# Altium PCB PCB.PcbDoc
Units mil, origin at the board's own origin, x right, y up, seen from the top; angles counter-clockwise.
Board outline 1968.5 x 2362.2 mil, 2 copper layers (Top Layer, Bottom Layer); 42 components, 31 nets, 112 pads, 35 vias.
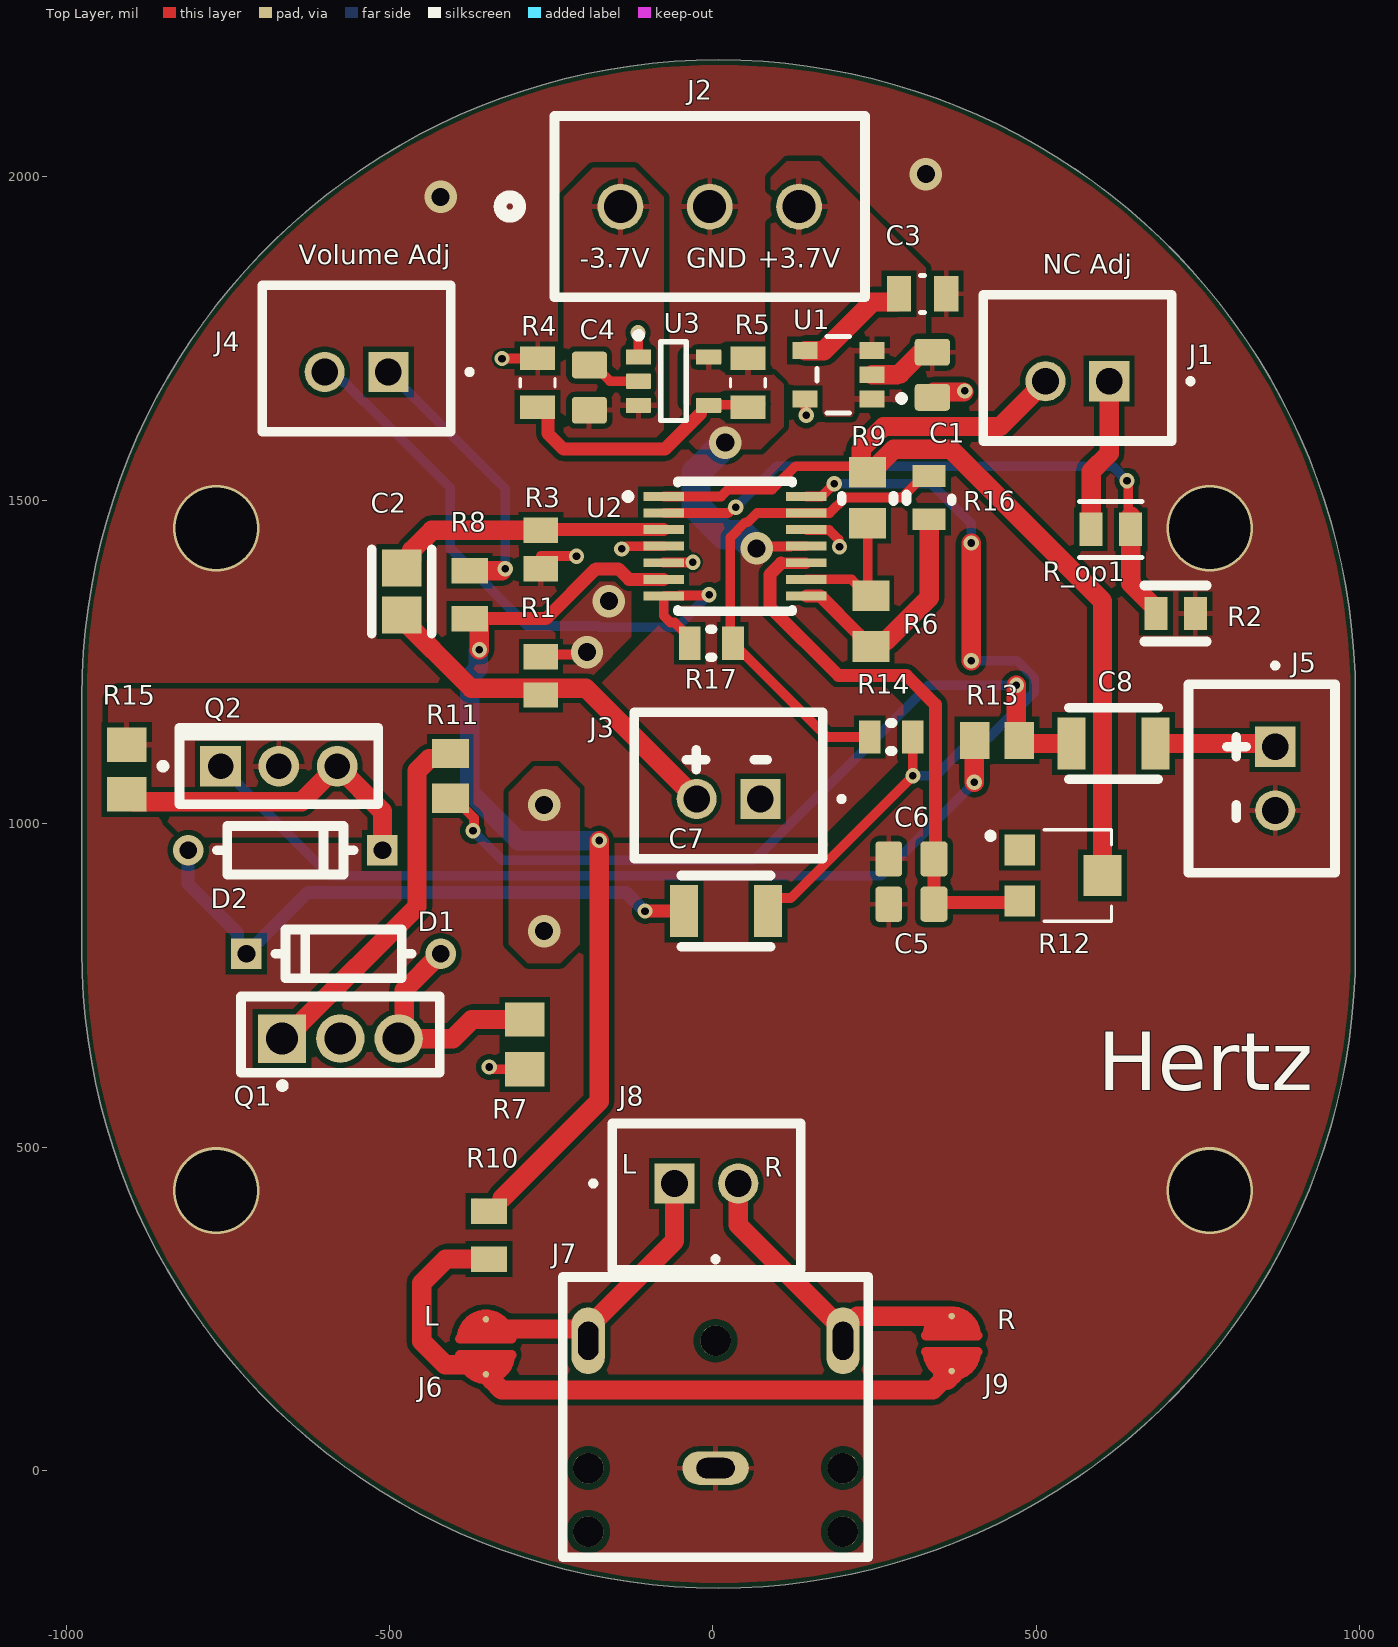
[diagram p0: Top Layer view]
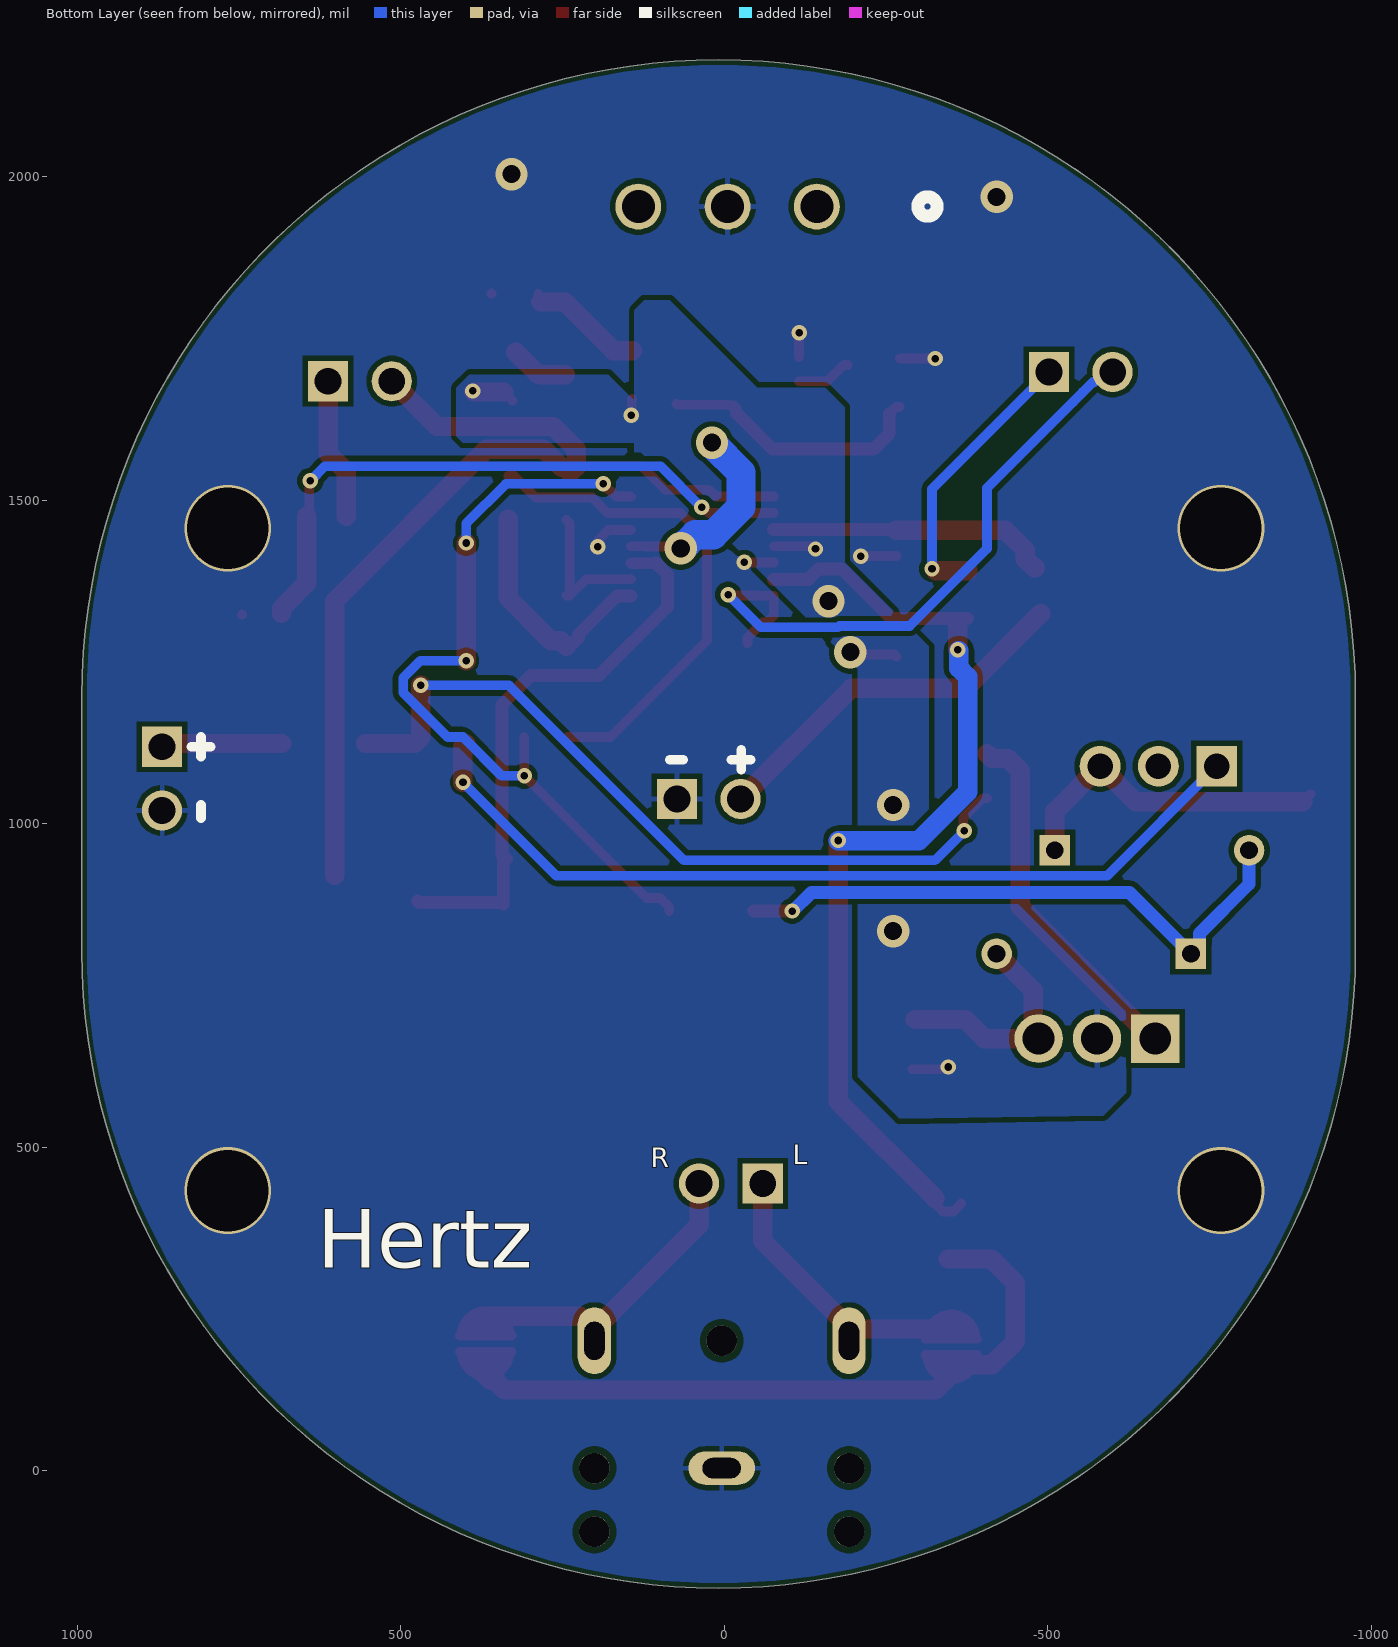
[diagram p1: Bottom Layer view, seen from below]

## Layer stack, top to bottom
Top Solder: solder mask 0.4, Solder Resist, Dk 3.5
Top Layer: signal copper 1.4
Dielectric 1: dielectric 12.6, FR-4, Dk 4.8
Bottom Layer: signal copper 1.4
Bottom Solder: solder mask 0.4, Solder Resist, Dk 3.5

## Board outline
-975.5,802.75 -975.5,1196.46 cw(c8.75,1196.46) 993,1196.46 993,802.75 cw(c8.75,802.75)

## Design rules (kind name [scope] priority, off if disabled: settings)
BoardOutlineClearance [All] p1: gap=7.87 ignorepadtopadclearanceinfootprint=FALSE
Clearance [All] p1: gap=8 ignorepadtopadclearanceinfootprint=FALSE except(9.84: Arc-Hole Track-Hole SMDPad-Hole THPad-Hole Via-Hole Fill-Hole Poly-Hole Region-Hole Text-Hole)
ComponentClearance [All] p1: gap=5 collisioncheckmode=3 verticalgap=5 showdistances=TRUE
DiffPairsRouting [All] p1: maxlimit=15 minlimit=8 mostfreqgap=8 toplayer_minwidth=8 toplayer_maxwidth=1000 toplayer_prefwidth=8 bottomlayer_minwidth=8 bottomlayer_maxwidth=1000 bottomlayer_prefwidth=8 maxuncoupledlength=500
Height [All] p1: minheight=0 maxheight=71497.94 prefheight=500
HoleSize [All] p1: absolutevalues=TRUE maxlimit=248.03 minlimit=11.81 maxpercent=80.000 minpercent=20.000
HoleToHoleClearance [All] p1: gap=9.84 allowstackedmicrovias=FALSE
MinimumAnnularRing [All] p1: minimumring=3
MinimumSolderMaskSliver [All] p1: minsoldermaskwidth=0
PlaneClearance [All] p1: clearance=8
PlaneConnect PlaneConnectPowerPads [InPadClass('PowerPads')] p1: planeconnectstyle=Direct reliefexpansion=20 reliefentries=4 reliefconductorwidth=10 reliefairgap=10
PlaneConnect [All] p2: pad.planeconnectstyle=Relief pad.reliefexpansion=11.81 pad.reliefentries=4 pad.reliefconductorwidth=8 pad.reliefairgap=8 via.planeconnectstyle=Direct via.reliefexpansion=11.81 via.reliefentries=4 via.reliefconductorwidth=5 via.reliefairgap=5
PolygonConnect PolygonConnectPowerPads [All vs (InPadClass('PowerPads'))] p1: connectstyle=Direct reliefconductorwidth=10 reliefentries=4 polygonreliefangle="90 Angle" airgapwidth=10
PolygonConnect [All] p2: thpad.connectstyle=Relief thpad.reliefconductorwidth=8 thpad.reliefentries=4 thpad.polygonreliefangle="90 Angle" thpad.airgapwidth=8 smdpad.connectstyle=Relief smdpad.reliefconductorwidth=8 smdpad.reliefentries=4 smdpad.polygonreliefangle="90 Angle" smdpad.airgapwidth=8 via.connectstyle=Direct via.reliefconductorwidth=5 via.reliefentries=4 via.polygonreliefangle="90 Angle" via.airgapwidth=5
RoutingVias [All] p1: holewidth=11.81 width=23.62 viastyle="Through Hole" minholewidth=11.81 minwidth=23.62 maxholewidth=23.62 maxwidth=259.84
SilkToSilkClearance [All] p1: silktosilkclearance=0
SilkToSolderMaskClearance [IsPad] p1: minsilkscreentomaskgap=5 clearancetoexposedcopper=TRUE
SolderMaskExpansion [All] p1: expansion=2.95 istentingtop=FALSE
SupplyNets "Schematic Supply Nets" [InNet('GND')] p1: voltage=0.000
Width [All] p1: maxlimit=1000 minlimit=8 preferedwidth=20 minimp=50.000000 maximp=50.000000 favimp=50.000000
20 further rules are at their usual default settings.

## Components (designator, comment, footprint, x,y, rotation, side; value= is the part's Value field where it differs from the comment)
C1 "CL21B225KAFNNNE" CAPC2012X135N 339,1693.96 r270 top
C2 "CL21A106KAYNNNE" FP-CL21-IPC_A -481,1359 r90 top
C3 "CC0805KPX7R9BB471" FP-CC0805-0_85-MFG 324,1819 r0 top value="470 pF"
C4 "CL21B225KAFNNNE" CAPC2012X135N -191,1674.04 r270 top
C5 "CL21B225KAFNNNE" CAPC2012X135N 306.68,875.67 r0 top
C6 "CL21B225KAFNNNE" CAPC2012X135N 306.68,945.67 r0 top
C7 "GRM32ER60J227ME05L" FP-GRM32E-0_3-MFG 20,865 r180 top
C8 "GRM32ER60J227ME05L" FP-GRM32E-0_3-MFG 619,1124 r0 top
D1 "1N4148" FP-017AG-MFG -571,799 r0 top
D2 "1N4148" FP-017AG-MFG -661,959 r180 top
J1 "10K Pot" JST_B2B-XH-A 563.21,1704.67 r0 top
J2 "395011003" CONN_39501-1003_MOL -143,1954 r0 top
J3 "Mic" JST_B2B-XH-A 24,1059 r0 top
J4 "10K Pot" JST_B2B-XH-A -551,1719 r0 top
J5 "Mic" JST_B2B-XH-A 848.33,1069.79 r90 top
J6 "SolderBridge" PCBCOMPONENT_1#1 -351,189 r90 top
J7 "SJ1-3523N" CUI_SJ1-3523N 4,4 r0 top
J8 "Mic" JST_B2B-XH-A -10.21,423.33 r180 top
J9 "SolderBridge" PCBCOMPONENT_1#2 369,194 r90 top
Q1 "BD139G" FP-77-09-MFG -576,674 r90 top
Q2 "BD140G" ONSC-TO-225-3-77-09 -671,1089 r90 top
R1 "ERA-6AED5622V" RESC2013X60X40LL20T25 -266,1228.53 r90 top
R2 "CRGCQ0805F4K7" FP-CRGCQ0805-IPC_C 715,1325 r0 top value=4.7KΩ
R3 "ERA-6AED5622V" RESC2013X60X40LL20T25 -266,1424 r90 top
R4 "RC0805FR-0733KL" RESC2012X60N -271,1681.6 r270 top
R5 "RC0805JR-0768KL" RESC2012X60N 54,1681.6 r90 top
R6 "RC0805FR-1310KL" RESC2013X60X35ML10T20 244,1313.37 r270 top
R7 "ERJ-6ENF1001V" RESC2013X70X40ML20T20 -291,659 r270 top
R8 "CRG0805F3K9" RESC2012X65N -376,1354 r90 top
R9 "RC0805FR-1310KL" RESC2013X60X35ML10T20 239,1504 r270 top
R10 "CRG0805F3K9" RESC2012X65N -346,364 r90 top
R11 "ERJ-P06J100V" RESC2013X70X40NL20T20 -406,1074 r90 top
R12 "TC33X-2-203E" TRIM_TC33X-2-203E 545,920 r0 top
R13 "ERJ-P06J100V" RESC2013X70X40NL20T20 439,1129 r0 top
R14 "12K 1% 0805(2012)" RESC0805(2012)_L 275.53,1134 r0 top value="12000.00 Ohm"
R15 "ERJ-6ENF1001V" RESC2013X70X40ML20T20 -906,1084 r270 top
R16 "12K 1% 0805(2012)" RESC0805(2012)_L 334,1504 r90 top value="12000.00 Ohm"
R17 "12K 1% 0805(2012)" RESC0805(2012)_L -2.54,1279 r0 top value="12000.00 Ohm"
R_op1 "CRGCQ0805F4K7" FP-CRGCQ0805-IPC_C 615,1455 r180 top value=4.7KΩ
U1 "MIC5205-3.3YM5-TR" FP-M5-MFG 194,1694 r180 top
U2 "LM324BIPWR" FP-PW0014A-MFG 34,1429 r0 top
U3 "TPS72301QDBVRQ1" DBV0005A_N -61,1684 r0 top

## Footprints (in the part's own frame and the unit in brackets; to place one, negate y for a bottom-side part, rotate by r counter-clockwise, add the part's x,y. Pads: shape width x height; smd on the part's side, far side on the other; paste and mask are expansions set on the pad)
CAPC2012X135N [mm]
  rrect25% 1.05x1.38 smd paste+0 mask+0.102: 1(-0.888,0) 2(0.888,0)
  body extent -1,-0.63 1,0.63, height 1.35
CONN_39501-1003_MOL [mil]
  round 71 hole 51: 1(0,0) 2(138,0) 3(276,0)
  silkscreen extent -186,-140 378,140
CUI_SJ1-3523N [mm]
  oval 2.616x1.308 hole 0.8 slot 1.5 at 0 deg: 1(0,0)
  oval 1.308x2.616 hole 0.8 slot 1.5 at 90 deg: 2(5,5) 3(-5,5)
  round 1.2 hole 1.2 unplated: ""(-5,-2.5) ""(-5,0) ""(0,5) ""(5,-2.5) ""(5,0)
  silkscreen extent -6,-3.5 6,8.3, body extent -5.97,-6.77 6.03,7.53, height 5.55
DBV0005A_N [mm] "SOT23, 5-Leads, Body 3.05x1.75mm, Pitch 0.95mm, IPC Medium Density"
  rrect17% 1x0.6 smd: 1(-1.375,0.95) 2(-1.375,0) 3(-1.375,-0.95) 4(1.375,-0.95) 5(1.375,0.95)
  silkscreen extent -1.5,-1.55 0.5,1.92, body extent -1.42,-1.46 1.42,1.46, height 1.08
FP-017AG-MFG [mm]
  rect 1.2x1.2 hole 0.7 paste-2539.97 mask+0: 1(-3.813,0)
  round 1.2 hole 0.7 paste-2539.97 mask+0: 2(3.813,0)
  silkscreen extent -2.68,-0.95 2.68,0.95, body extent -4.51,-1.05 4.51,1.05, height 0.25
FP-77-09-MFG [mm]
  rect 1.9x1.9 hole 1.25 paste-2539.97 mask+0: 1(-0.155,2.29)
  round 1.9 hole 1.25 paste-2539.97 mask+0: 2(-0.155,0) 3(-0.155,-2.29)
  silkscreen extent -2.12,-3.9 1.5,3.9, body extent -1.6,-4 1.6,4, height 0.25
FP-CC0805-0_85-MFG [mm]
  rect 0.95x1.4 smd paste+0 mask+0: 1(-0.925,0) 2(0.925,0)
  silkscreen extent -0.08,-0.72 0.08,0.72, body extent -1.6,-1.05 1.6,1.05, height 0.25
FP-CL21-IPC_A [mil]
  rect 57.27x61.27 smd paste+0 mask+0: 1(-36.45,0) 2(36.45,0)
  silkscreen extent -65,-46 65,46, body extent -85,-50 85,50, height 10
FP-CRGCQ0805-IPC_C [mil]
  rect 35.67x51.57 smd paste+0 mask+0: 1(-30.55,0) 2(30.55,0)
  silkscreen extent -48,-43 48,43, body extent -52,-31 52,31, height 10
FP-GRM32E-0_3-MFG [mm]
  rect 1.1x2.05 smd paste+0 mask+0: 1(-1.65,0) 2(1.65,0)
  silkscreen extent -1.75,-1.4 1.75,1.4, body extent -2.3,-1.5 2.3,1.5, height 0.25
FP-M5-MFG [mm]
  rect 1x0.66 smd paste+0 mask+0: 1(-1.315,0.95) 2(-1.315,0) 3(-1.315,-0.95) 4(1.315,-0.95) 5(1.315,0.95)
  silkscreen extent -2.6,-1.5 0.85,1.5, body extent -1.91,-1.6 1.91,1.6, height 0.25
FP-PW0014A-MFG [mm]
  rect 1.6x0.35 smd paste-1000 mask+0: 1(-2.8,1.95) 2(-2.8,1.3) 3(-2.8,0.65) 4(-2.8,0) 5(-2.8,-0.65) 6(-2.8,-1.3) 7(-2.8,-1.95) 8(2.8,-1.95) 9(2.8,-1.3) 10(2.8,-0.65) 11(2.8,0) 12(2.8,0.65) 13(2.8,1.3) 14(2.8,1.95)
  silkscreen extent -4.32,-2.55 2.25,2.55, body extent -3.7,-2.8 3.7,2.8, height 0.25
JST_B2B-XH-A [mm]
  rect 1.575x1.575 / inner round 1.575 / far side rect 1.575x1.575 hole 1.05: 1(1.25,-0.525)
  round 1.575 hole 1.05: 2(-1.25,-0.525)
  silkscreen extent -3.7,-2.88 4.54,2.87
ONSC-TO-225-3-77-09 [mm] "FM, 3-Leads, Body 7.8x3mm, Pitch 2.29mm"
  rect 1.6x1.6 hole 1: 1(0,2.29)
  round 1.6 hole 1: 2(0,0) 3(0,-2.29)
  silkscreen extent -1.49,-3.9 1.51,4.67, body extent -1.49,-3.9 1.51,3.9, height 13.64
PCBCOMPONENT_1#1 [mil]
  round 10 smd mask+0: 1(45,0) 2(-40,0)
  Top Layer region: -10,-40 -25,-40 -45,-20 -45,-10 -50,-5 -50,15 -30,35 -25,35 -20,40 -10,40
  Top Layer region: 15,40 30,40 50,20 50,10 55,5 55,-15 35,-35 30,-35 25,-40 15,-40
  Top Layer lines w10: -10,40 ccw(c-10,0) -25,37.08 ; -10,40 ccw(c-10,0) -25,37.08 ; -10,40 ccw(c-10,0) -25,37.08 ; -10,40 ccw(c-10,0) -25,37.08 ; 15,40 cw(c15,0) 45,-26.46 ; 15,40 cw(c15,0) 45,-26.46 ; 15,40 cw(c15,0) 15,-40 ; 15,40 cw(c15,0) 45,-26.46 ; -25,37.08 ccw(c-10,0) -26.61,36.39 ; -25,37.08 ccw(c-10,0) -48.98,-8.98 ; -25,37.08 ccw(c-10,0) -49.43,-6.71 ; -25,37.08 ccw(c-10,0) -26.61,36.39 ; -26.61,36.39 ccw(c-10,0) -46.39,16.61 ; -26.61,36.39 ccw(c-10,0) -46.39,16.61 ; -46.39,16.61 ccw(c-10,0) -49,8.89 ; -46.39,16.61 ccw(c-10,0) -49,8.89 ; -49,8.89 ccw(c-10,0) -49.43,-6.71 ; -49,8.89 ccw(c-10,0) -49.43,-6.71 ; -49.43,-6.71 ccw(c-10,0) -48.98,-8.98 ; -49.43,-6.71 ccw(c-10,0) -49.38,-7 ; -49.43,-6.71 ccw(c-10,0) -49.38,-7 ; -49.38,-7 ccw(c-10,0) -48.98,-8.98 ; -49.38,-7 ccw(c-10,0) -48.98,-8.98 ; -48.98,-8.98 ccw(c-10,0) -10,-40 ; -48.98,-8.98 ccw(c-10,0) -10,-40 ; -48.98,-8.98 ccw(c-10,0) -10,-40 ; -48.98,-8.98 ccw(c-10,0) -10,-40 ; 45,-26.46 cw(c15,0) 15,-40 ; 45,-26.46 cw(c15,0) 15,-40 ; 45,-26.46 cw(c15,0) 15,-40
  Top Layer lines w15: -10,40 -10,30 ; -10,40 -10,30 ; -10,40 -10,30 ; -10,40 -10,30 ; 15,40 15,-30 ; 15,40 15,-30 ; 15,40 15,-40 ; 15,40 15,-30 ; -10,30 -10,-40 -10,30 ; 15,-30 15,-40 ; 15,-30 15,-40 ; 15,-30 15,-40
PCBCOMPONENT_1#2 [mil]
  round 10 smd mask+0: 1(45,0) 2(-40,0)
  Top Layer region: 15,40 30,40 50,20 50,10 55,5 55,-15 35,-35 30,-35 25,-40 15,-40
  Top Layer region: -10,-40 -25,-40 -45,-20 -45,-10 -50,-5 -50,15 -30,35 -25,35 -20,40 -10,40
  Top Layer lines w10: -10,40 ccw(c-10,0) -48.98,8.98 ; -10,40 ccw(c-10,0) -48.98,8.98 ; -10,40 ccw(c-10,0) -48.98,8.98 ; -10,40 ccw(c-10,0) -48.98,8.98 ; 15,40 cw(c15,0) 45,26.46 ; 15,40 cw(c15,0) 45,26.46 ; 15,40 cw(c15,0) 15,-40 ; 15,40 cw(c15,0) 45,26.46 ; 45,26.46 cw(c15,0) 15,-40 ; 45,26.46 cw(c15,0) 15,-40 ; 45,26.46 cw(c15,0) 15,-40 ; -48.98,8.98 ccw(c-10,0) -10,-40 ; -48.98,8.98 ccw(c-10,0) -10,-40 ; -48.98,8.98 ccw(c-10,0) -10,-40 ; -48.98,8.98 ccw(c-10,0) -10,-40
  Top Layer lines w15: -10,40 -10,30 ; -10,40 -10,30 ; -10,40 -10,30 ; -10,40 -10,30 ; 15,40 15,-30 ; 15,40 15,-30 ; 15,40 15,-40 ; 15,40 15,-30 ; -10,30 -10,-40 -10,30 ; 15,-30 15,-40 ; 15,-30 15,-40 ; 15,-30 15,-40
RESC0805(2012)_L [mm] "Chip Resistor, Body 2.0x1.3mm, IPC High Density"
  rect 0.85x1.3 smd: 1(-0.85,0) 2(0.85,0)
  silkscreen extent -0.05,-0.55 0.05,0.55, body extent -1.1,-0.67 1.1,0.68, height 0.7
RESC2012X60N [mm]
  rect 0.92x1.38 smd: 1(-0.955,0) 2(0.955,0)
  silkscreen extent -0.17,-0.68 0.17,0.68, body extent -1,-0.63 1,0.63, height 0.6
RESC2012X65N [mm]
  rect 1x1.42 smd: 1(-0.935,0) 2(0.935,0)
RESC2013X60X35ML10T20 [mm] "Chip Resistor, 2-Leads, Body 2.00x1.25mm, IPC Low Density"
  rect 1.2x1.45 smd: 1(-1,0) 2(1,0)
  body extent -1.05,-0.67 1.05,0.67, height 0.6
RESC2013X60X40LL20T25 [mm] "Chip Resistor, 2-Leads, Body 2.00x1.25mm, IPC High Density"
  rect 1x1.35 smd: 1(-0.75,0) 2(0.75,0)
  body extent -1.1,-0.72 1.1,0.72, height 0.6
RESC2013X70X40ML20T20 [mm] "Chip Resistor, 2-Leads, Body 2.00x1.25mm, IPC Low Density"
  rect 1.35x1.55 smd: 1(-0.975,0) 2(0.975,0)
  body extent -1.1,-0.72 1.1,0.72, height 0.7
RESC2013X70X40NL20T20 [mm] "Chip Resistor, 2-Leads, Body 2.00x1.25mm, IPC Medium Density"
  rect 1.15x1.45 smd: 1(-0.875,0) 2(0.875,0)
  body extent -1.1,-0.72 1.1,0.72, height 0.7
TRIM_TC33X-2-203E [mm]
  rect 1.2x1.2 smd: 1(-1.8,1) 3(-1.8,-1)
  rect 1.5x1.6 smd: 2(1.45,0)
  silkscreen extent -3.07,-1.8 1.8,1.8, body extent -1.9,-1.5 1.9,1.5, height 1.1

## Part data
C1 C4: "2.2 ÂµF Â±10% 25V Ceramic Capacitor X7R 0805 (2012 Metric)", LCSC part #=C19110, Package="SMD-2 Samsung", Check_prices=https://www.snapeda.com/parts/CL21B225KAFNNNE/Samsung/view-part/?ref=eda, MF=Samsung, MP=CL21B225KAFNNNE, SnapEDA_Link=https://www.snapeda.com/parts/CL21B225KAFNNNE/Samsung/view-part/?ref=snap
C2: library part CMP-13271-002975-1, "CL21 Series 0805 10uF 25V ±10% Tolerance X5R Multilayer Ceramic Chip Capacitor", Capacitance=10uF, Case Code (Imperial)=0805, Case Code (Metric)=2012, Dielectric=X5R, LCSC part #=C15850, Max Operating Temperature=85°C, Min Operating Temperature=-55°C, Package Quantity=1, Tolerance=10%, Voltage Rating=25V, Case/Package=0805, Depth=1.25mm, Height=1.25mm, Length=2mm, Mount="Surface Mount", Packaging="Tape and Reel", Radiation Hardening=No, Thickness=0.057inch, Width=0.049inch
C3: library part CMP-03422-001305-1, "CC0805 470 pF X7R 10.00% 50 V", Capacitance="470 pF", LCSC part #=C437474, Manufacturer=Yageo, Package=CC0805-0.85, Temperature="-30°C to +85°C", Temperature Characteristic=X7R, Temperature Range High=+85°C, Temperature Range Low=-30°C, Tolerance=0.1, Voltage Rating="50 V", Automotive=No, Category=Cap, ComponentLink2Description=Datasheet, ComponentLink2URL=http://www.yageo.com/documents/recent/UPY-GPHC_Y5V_6.3V-to-50V_8.pdf, Device Class L1="Passive Components", Device Class L2=Capacitors, Device Class L3="Ceramic Capacitors", Footprint Url=http://www.yageo.com/exep/pages/download/literatures/UPY-C_GEN_24.pdf, Height=0.95mm, Ipc Land Pattern Name=CAPC200125X85, Lead Free=Yes, Manufacturer Part Number=CC0805KPX7R9BB471, Material=Ceramic, Mouser Description="Multilayer Ceramic Capacitors MLCC - SMD/SMT 470pF 50V X7R 10%", Octopart=https://octopart.com/cc0805kpx7r9bb471-yageo-88496836, RoHS=TRUE
C5 C6: "2.2 ÂµF Â±10% 25V Ceramic Capacitor X7R 0805 (2012 Metric)", LCSC part #=C437424, Package="SMD-2 Samsung", Check_prices=https://www.snapeda.com/parts/CL21B225KAFNNNE/Samsung/view-part/?ref=eda, MF=Samsung, MP=CL21B225KAFNNNE, SnapEDA_Link=https://www.snapeda.com/parts/CL21B225KAFNNNE/Samsung/view-part/?ref=snap
C7 C8: library part CMP-06035-024340-1, "Chip Multilayer Ceramic Capacitors for General Purpose, 1210, 220uF, X5R, 15%, 20%, 6.3V", Capacitance=220uF, Dielectric=X5R, LCSC part #=C469553, Tolerance=20%, Voltage Rating (DC)=6.3V, Length=3.2mm, Thickness=2.5mm, Width=2.5mm
D1 D2: library part CMP-07163-000046-1, "DIODE GEN PURP 100V 200MA DO35", Average Rectified Current=200mA, Capacitance=4pF, Case/Package=DO-35, Current=4A, Forward Current=300mA, Forward Voltage=1V, Max Forward Surge Current (Ifsm)=1A, Max Operating Temperature=175°C, Max Power Dissipation=500mW, Max Repetitive Reverse Voltage (Vrrm)=100V, Max Reverse Current=5uA, Min Operating Temperature=-65°C, Package Quantity=2000, Contact Plating=Tin, Current Rating=200mA, Diameter=1.91mm, Element Configuration=Single, Height=4.56mm, Lead Free="Lead Free", Length=4.56mm, Max Reverse Voltage (DC)=100V, Max Surge Current=4A, Mount="Through Hole", Number of Pins=2, Output Current=200mA, Outside Diameter=1.85mm, Packaging=Bulk, Peak Non-Repetitive Surge Current=4A, Polarity=Standard, Power Dissipation=500mW, Radiation Hardening=No, REACH SVHC="No SVHC", Recovery Time=4ns, Reverse Recovery Time=4ns, Reverse Voltage=100V, Series=-, Voltage=100V, Voltage Rating (DC)=100V, Weight=0.01lb, Width=1.91mm
J1 J3 J4 J5 J8: library part B2B-XH-A, Package=None, Availability=Unavailable, MF="{'manufacturer': u'JST Sales America Inc.'}", MP=B2B-XH-A, Price=None
J2: Package=None, Availability=Unavailable, MP=395011003, Price=None
J7: "3.5 mm, Stereo, Right Angle, Through Hole, 3 Conductors, 0 Internal Switches, Audio Jack Connector", LCSC part #=C20182914, Package=None, Check_prices=https://www.snapeda.com/parts/SJ1-3523N/Same+Sky/view-part/?ref=eda, MF="Same Sky", MP=SJ1-3523N, SnapEDA_Link=https://www.snapeda.com/parts/SJ1-3523N/Same+Sky/view-part/?ref=snap
Q1: library part CMP-1048-01269-2, Case/Package=TO-225, Collector Base Voltage (VCBO)=80V, Collector Emitter Saturation Voltage=500mV, Current Rating=1.5A, Emitter Base Voltage (VEBO)=5V, Manufacturer Lifecycle Status=ACTIVE, Max Junction Temperature (Tj)=150°C, Max Power Dissipation=1.25W, Min Operating Temperature=-55°C, Collector Emitter Breakdown Voltage=80V, Collector Emitter Voltage (VCEO)=80V, Contact Plating=Tin, Element Configuration=Single, Height=11.04mm, hFE Min=25, Lead Free="Lead Free", Length=7.74mm, Lifecycle Status=Production, Max Collector Current=1.5A, Max Operating Temperature=150°C, NexarPartId=354669, Number of Elements=1, Number of Pins=3, Packaging=Bulk, Polarity=NPN, Power Dissipation=1.25W, Radiation Hardening=No, REACH SVHC="No SVHC", RoHS=Compliant, Schedule B="8541290080, 8541290080", Voltage Rating (DC)=80V, Weight=4.535924g, Width=2.66mm
Q2: library part CMP-1048-01270-1, "Plastic Medium-Power Silicon PNP Transistor, 3-Pin TO-225, Pb-Free, Bulk Box", Manufacturer="On Semiconductor", ComponentLink1Description="Manufacturer URL", ComponentLink1URL=http://www.onsemi.com/, ComponentLink2Description=Datasheet, ComponentLink2URL=http://www.onsemi.com/pub_link/Collateral/BD136-D.PDF, ComponentLink3Description="Package Specification", ComponentLink3URL=http://www.onsemi.com/pub_link/Collateral/77-09.PDF, DatasheetVersion="Rev. 15", IC Continuous (A)=1.5, Mounting Technology="Through Hole", PackageDescription="3-Pin Flange Mount, Vertical Straight Lead, Body 7.6 x 2.7 mm, Pitch 2.29 mm", PackageReference=TO-225-3-77-09, PackageVersion="Rev. AC, 12/2013", Packing="Bulk Box", PartNumber=BD140G, Polarity=PNP, RoHS=TRUE
R1 R3: library part CMP-2001-00694-1, LCSC part #=C445652, Manufacturer=Panasonic, Part Number=ERA-6AED5622V
R2 R_op1: library part CMP-03211-010668-1, "CRGCQ0805 4.7KΩ 0.125W ±100ppm/°C 1% 150V", Ambient Temperature Range High=+70°C, LCSC part #=C336873, Manufacturer="TE Connectivity", Package=CRGCQ0805, Power Rating=0.125W, Resistance=4.7KΩ, Temperature="-55°C to +155°C", Temperature Coefficient=±100ppm/°C, Temperature Range High=+155°C, Temperature Range Low=-55°C, Tolerance=0.01, Voltage Rating=150V, Automotive=Yes, Automotive Grade="Grade 837", Category=Res, ComponentLink2Description=Datasheet, ComponentLink2URL=https://www.te.com/commerce/DocumentDelivery/DDEController?Action=showdoc&DocId=Data+Sheet%7F1773204-3%7F1%7Fpdf%7FEnglish%7FENG_DS_1773204-3_1.pdf%7F4-2176341-846, Composition="Thick Film", Device Class L1="Passive Components", Device Class L2=Resistors, Device Class L3="Chip SMD Resistors", Height=0.65mm, Ipc Land Pattern Name=RESC200125X55, Lead Free=Yes, Manufacturer Part Number=CRGCQ0805F4K7, Octopart=https://octopart.com/crgcq0805f4k7-te+connectivity-91018183, RoHS=TRUE, Series=CRGCQ
R4: "33 kOhms Â±1% 0.125W, 1/8W Chip Resistor 0805 (2012 Metric) Moisture Resistant Thick Film", LCSC part #=C141696, Package="2012 Yageo", Check_prices=https://www.snapeda.com/parts/RC0805FR-0733KL/Yageo/view-part/?ref=eda, MF=Yageo, MP=RC0805FR-0733KL, SnapEDA_Link=https://www.snapeda.com/parts/RC0805FR-0733KL/Yageo/view-part/?ref=snap
R5: "68 kOhms Â±5% 0.125W, 1/8W Chip Resistor 0805 (2012 Metric) Moisture Resistant Thick Film", LCSC part #=C137412, Package="2012 Yageo", Check_prices=https://www.snapeda.com/parts/RC0805JR-0768KL/Yageo/view-part/?ref=eda, MF=Yageo, MP=RC0805JR-0768KL, SnapEDA_Link=https://www.snapeda.com/parts/RC0805JR-0768KL/Yageo/view-part/?ref=snap
R6 R9: library part CMP-2001-04513-1, LCSC part #=C191101, Manufacturer=Yageo, Part Number=RC0805FR-1310KL
R7 R15: library part CMP-2001-04375-5, "Chip Resistor, 1 KOhm, +/- 1%, 0.125 W, -55 to 155 degC, 0805 (2012 Metric), RoHS, Tape and Reel", LCSC part #=C79496, Manufacturer=Panasonic, Max Operating Temperature="155 degC", Min Operating Temperature="-55 degC", Package Quantity=1, Voltage Rating="150 V", ComponentLink1Description="Manufacturer URL", ComponentLink1URL=http://www.panasonic.com/, ComponentLink2Description=Datasheet, ComponentLink2URL=http://industrial.panasonic.com/cdbs/www-data/pdf/RDA0000/AOA0000C86.pdf, DatasheetVersion=04/2015, Height="0.6 mm", Length="2 mm", Mount="Surface Mount", Mounting Technology="Surface Mount", PackageDescription="2-Pin Surface Mount Device, Body 2 x 1.25 mm", PackageReference=0805, Packaging="Cut Tape", REACH SVHC=Yes, RoHSCompliant=true
R8 R10: "CRG0805 1% 3K9", LCSC part #=C473293, Package=None, Availability=Unavailable, MP=CRG0805F3K9, Price=None
R11 R13: library part CMP-2001-00475-1, LCSC part #=C6614492, Manufacturer=Panasonic, Part Number=ERJ-P06J100V
R12: "20 kOhms 0.1W, 1/10W J Lead Surface Mount Trimmer Potentiometer Cermet 1 Turn Top Adjustment", LCSC part #=C720648, Package="1608 Bourns", Check_prices=https://www.snapeda.com/parts/TC33X-2-203E/Bourns/view-part/312812/?ref=eda, Digi-Key_Part_Number=TC33X-2-203ECT-ND, MF=Bourns, MP=TC33X-2-203E, Purchase-URL=https://pricing.snapeda.com/search/part/TC33X-2-203E/?ref=eda, SnapEDA_Link=https://www.snapeda.com/parts/TC33X-2-203E/Bourns/view-part/312812/?ref=snap
R14 R16 R17: library part CMP-1013-00631-1, "12K 0.125W 1% 0805 (2012 Metric)  SMD", Case-EIA=0805, Case-Metric=2012, LCSC part #=C413717, Power="0.125 W", Tolerance="1 %", Technology=SMT
U1: library part CMP-06324-000014-1, "IC REG LINEAR 3.3V 150MA SOT23-5", Dropout Voltage=165mV, LCSC part #=C37970, Manufacturer=Microchip, Max Junction Temp=+125°C, Max Supply Voltage=16V, Min Supply Voltage=2.5V, Output Current=150mA, Package=M5, Temperature="-40°C to +125°C", Temperature Range Low=-40°C, Accuracy Percentage=2%, Automotive=No, ComponentLink2Description=Datasheet, ComponentLink2URL=http://ww1.microchip.com/downloads/en/DeviceDoc/20005785A.pdf, Device Class L1="Integrated Circuits (ICs)", Device Class L2="Power Management ICs", Device Class L3="Voltage Regulators - Linear", Digikey Description="IC REG LINEAR 3.3V 150MA SOT23-5", Height=1.45mm, Ipc Land Pattern Name=SOT95P280X118-5, Lead Free=Yes, Manufacturer Part Number=MIC5205-3.3YM5-TR, Mouser Description="LDO Voltage Regulators", Number Of Outputs=1, Octopart=https://octopart.com/mic5205-3.3ym5-tr-microchip-66802130, Output Type=Fixed, RoHS=TRUE, Standoff Height=0mm, Temperature Range High=+125°C
U2: library part CMP-00370-131314463-1, "LM324BIPWR Quad, 36-V, 1.2-MHz 3-mV offset voltage operational amplifier 14-TSSOP -40 to 85", Case/Package=TSSOP, LCSC part #=C5214225, Manufacturer Lifecycle Status=ACTIVE, Height=1.2mm, Length=5mm, Lifecycle Status=Production, NexarPartId=131314463, Number of Pins=14, Thickness=1mm, Width=4.4mm
U3: library part CMP-0394-00323-2, "Single Output High PSRR LDO, 200 mA, Adjustable -10 to -1.2 V Output, -10 to -2.7 V Input, 5-pin SOT-23 (DBV), -40 to 125 degC, Green (RoHS & no Sb/Br)", Manufacturer="Texas Instruments", Accuracy(%)=2, Code_JEDEC=MO-178, ComponentLink1Description="Manufacturer URL", ComponentLink1URL=http://www.ti.com/, ComponentLink2Description=Datasheet, ComponentLink2URL=http://www.ti.com/general/docs/lit/getliterature.tsp?genericPartNumber=TPS72301-Q1&fileType=pdf, ComponentLink3Description="Package Specification", ComponentLink3URL=http://www.ti.com/litv/pdf/mpds018i, DatasheetVersion=SLVSAJ4B, Eco-Plan="Green (RoHS & no Sb/Br)", Iout(Max)(A)=0.2, Iq(Typ)(mA)=0.13, Mounting Technology="Surface Mount", PackageDescription="5-Pin Plastic Small Outline, Body 1.60 Ãƒâ€” 2.90 mm, Pitch 0.95 mm", PackageReference=DBV0005A, PackageVersion=4073253-4/K, PartNumber=TPS72301QDBVRQ1, SubFamily="Single Channel LDO", Vdo(Typ)(mV)=280, Vin(Max)(V)=-2.7, Vin(Min)(V)=-10, Vout Adj(Max)(V)=-1.2, Vout Adj(Min)(V)=-10

## Via types
v1: diameter 23.62, hole 11.81, Top Layer to Bottom Layer, 23 vias
v2: diameter 50, hole 28, Top Layer to Bottom Layer, 8 vias
v3: diameter 133.86, hole 125.98, Top Layer to Bottom Layer, 4 vias

## Nets (pads, with @x,y where several pads share a name; then routed paths per layer and width w, separated by ;. In a path a pad name is that pad's centre, name@x,y a point inside that pad or via, vN(x,y) a via of type N, cw(c..) or ccw(c..) an arc to the next point about the centre after c; other vN are vias at no path point)
+3.3V: C1.2 Q1.2 R1.2 R7.2 U1.5 U2.4 | length 294.4
  Top Layer w15: v1(-346,624) -343.67,624 -340.28,620.61 R7.2 ; R1.2 -262.44,1261.61 -198.38,1261.61 v2(-194.83,1265.17) ; v2@-163.5,1341.5 v2(-161,1344) ; v1(-141,1424.78) -138.67,1424.78 -134.45,1429 U2.4 ; U1.5 143.11,1655.71 143.11,1632.2 v1(144,1631.31) ; C1.2@327.46,1653.96 C1.2@340.85,1667.35 ; v1@387.35,1667.35 v1(389,1669)
  Top Layer w30: C1.2@340.85,1667.35 v1@387.35,1667.35
  other v2: -261,834 -261,1029
+3.7v: J2.3 U1.1 U1.3
-3.3V: Q2.2 R5.2 R15.1 U2.11 U3.5 | length 316
  Top Layer w15: v2(67.38,1425.62) 70.15,1428.39 120.24,1428.39 120.85,1429 U2.11
  Bottom Layer w45: v2(19,1589) 19,1587.65 -26,1542.65 -26,1489.84 17.08,1446.76 44.89,1446.76 66.03,1425.62 v2(67.38,1425.62)
-3.7V: C4.2 J2.1 U3.3
Audio: J6.2 J9.2 R10.1 | length 1088
  Top Layer w15: J9.2 386.53,154
  Top Layer w20: -388.08,164 -387.39,164 -351,164 -346,164
  Top Layer w30: -388.08,164 -414,164 -450,200 -450,290 -412.81,327.19 R10.1 ; J6.2 -342.02,140.02 -326.78,124.78 339.78,124.78 360.02,145.02
  Top Layer w40: 360.02,145.02 J9.2
"Audio Buffer": J4.2 R17.1 U2.7 | length 998.6
  Top Layer w15: R17.1 -36,1287.86 -59.15,1311.01 -65.63,1311.01 -76.24,1321.62 U2.7 -52.85,1352.23 -52.24,1352.84 -7.16,1352.84 v1(-6,1354)
  Bottom Layer w15: J4.2 -587.49,1698.33 -572.1,1682.94 -569.94,1682.94 -554.58,1667.57 -554.58,1667.19 -539.21,1651.83 -538.83,1651.83 -406,1519 -406,1425.09 -286.58,1305.67 -178.05,1305.67 -175.88,1303.5 -56.5,1303.5 v1(-6,1354)
"Delay Out": R6.2 R16.1 U2.8 | length 382.6
  Top Layer w20: U2.8 165.77,1352.23 225.46,1292.54 225.46,1287.62 239.08,1274 R6.2@248.92,1274
  Top Layer w30: R6.2 252.62,1282.62 267.62,1282.62 334,1349 R16.1
GND: C1.1 C3.2 C5.1 C6.1 J2.2 J3.1 J5.2 J7.1 R2.2 R3.1 R4.1 U1.2 U2.5 U2.12 U3.1 | length 361.9
  Top Layer w15: v1(-326,1719) -325.9,1719.1 -271.1,1719.1 R4.1 ; R3.1@-266,1414 -265.76,1413.76 -211.24,1413.76 v1(-211,1413.53) ; v1(-116,1759) -115.57,1758.57 -115.57,1721.83 U3.1 ; U2.5@-76.53,1403.7 U2.5 -75.94,1403.7 -31.3,1403.7 v1(-31,1404) ; U2.12 144.85,1453.98 179.56,1453.98 193.89,1439.65 193.89,1429.62 v1(195.54,1427.97) ; 284,1694 285.65,1695.65 289.19,1695.65 ; C1.1@322.5,1728.96 C1.1@329,1728.96 ; C3.2@359.71,1819.71 C3.2 ; R2.2@745,1323.74 R2.2@745.62,1323.13
  Top Layer w30: U1.2 284,1694 ; 289.19,1695.65 C1.1@322.5,1728.96
  other v2: -421,1969 329,2004
  other v3: -767.72,433.07 767.72,433.07 -767.72,1456.69 767.72,1456.69
Mic: C2.2 R3.2 U2.3 | length 435.8
  Top Layer w20: R3.2@-264.94,1454.59 U2.3
  Top Layer w30: C2.2 -479,1395.45 -465.37,1409.08 -465.37,1422.75 -434.58,1453.53 R3.2
"Mic Buffer": J1.2 R9.1 R12.2 U2.1 | length 1591.7
  Top Layer w15: U2.1 12.69,1505.77 23.29,1516.38 91.38,1516.38 127.73,1552.73 228.93,1552.73 R9.1@238.92,1542.74
  Top Layer w30: R9.1 237.62,1543.37 229,1551.99 229,1579 264,1614 444,1614 J1.2 ; R9.1@251.35,1550.8 279.55,1579 367.31,1579 602.09,1344.23 R12.2
"Mix Out": C7.1 R14.2 U2.14 | length 1246.2
  Top Layer w15: C7.1 84.96,871.17 99.11,885.33 120.33,885.33 v1(309,1074) R14.2 ; U2.14 167.62,1505.77 v1(187.27,1525.42)
  Top Layer w30: v1(399,1252) v1(399,1434)
  Bottom Layer w15: v1(187.27,1525.42) 337.58,1525.42 399,1464 v1(399,1434) ; v1(309,1074) 344,1074 404.04,1134.04 427.67,1134.04 496.31,1202.69 496.31,1225.31 469.62,1252 v1(399,1252)
NetC2_1: C2.1 J3.2 R1.1 | length 584.5
  Top Layer w15: C2.1@-491,1324.84 C2.1@-489,1324.84
  Top Layer w30: C2.1@-489,1324.84 -373.64,1209.47 -266,1209.47 -196.35,1209.47 J3.2
NetC3_1: C3.1 U1.4 | length 197.4
  Top Layer w15: C3.1@276.38,1798.94 283.88,1806.44 287.58,1810.14 C3.1
  Top Layer w30: U1.4 171.4,1731.4 246.44,1806.44 C3.1@283.88,1806.44
NetC4_1: C4.1 U3.2 | length 86.2
  Top Layer w15: C4.1 -184.5,1709 -159.5,1684 U3.2
NetC5_2: C5.2 C6.2 R12.3 U2.10 | length 877.4
  Top Layer w18: 105.28,1402.71 U2.10@143.53,1402.71
  Top Layer w20: 105.28,1402.71 87.95,1385.38 87.95,1335.05 194,1229 299,1229 343.73,1184.27 343.73,952.77 C6.2@336.64,945.67 ; C6.2 C5.2 344.11,878.15 471.66,878.15 R12.3
NetC7_2: C7.2 D1.1 D2.2 | length 924.8
  Top Layer w20: v1(-105,865) C7.2
  Bottom Layer w20: D2.2 -811.12,906.94 -734.74,830.56 -734.74,812.62 D1.1 -626.12,894 -134.98,894 -105.98,865 v1(-105,865)
NetC8_1: C8.1 R11.1 R13.2 | length 1210.3
  Top Layer w15: R11.1 -400.09,1039.55 -369.3,1008.76 -369.3,993.03 -371,991.33 v1(-371,989) ; R13.2 R13.2@478.45,1124
  Top Layer w30: v1(469,1214) 469,1133.45 R13.2 ; R13.2@478.45,1124 C8.1
  Bottom Layer w15: v1(-371,989) -325.5,943.5 62.31,943.5 332.81,1214 v1(469,1214)
NetC8_2: C8.2 J5.1 | length 187.1
  Top Layer w15: J5.1@864,1124 J5.1
  Top Layer w30: C8.2 J5.1@864,1124
NetD1_2: D1.2 Q1.3 R7.1 | length 372.5
  Top Layer w15: D1.2@-420.94,798.94 D1.2@-415.67,804.21
  Top Layer w20: Q1.3 Q1.3@-477.21,676.53 ; R7.1@-294.94,697.39 R7.1
  Top Layer w30: Q1.3 -402.1,667.9 -372.61,697.39 R7.1@-294.94,697.39 ; Q1.3@-477.21,676.53 -477.21,742.67 D1.2
NetD2_1: D2.1 Q2.3 R15.2 | length 511.7
  Top Layer w15: R15.2 R15.2@-894.39,1034
  Top Layer w30: R15.2@-894.39,1034 -635.84,1034 Q2.3 -510.88,1019.04 D2.1
NetJ1_1: J1.1 R_op1.2 | length 227.7
  Top Layer w15: R_op1.2@579.45,1480 R_op1.2@584.45,1475
  Top Layer w30: R_op1.2@584.45,1475 584.45,1544.45 612.43,1572.43 J1.1
NetJ4_1: J4.1 R8.2 | length 435.5
  Top Layer w15: v1@-326.52,1390.81 -323.33,1394 v1(-321,1394)
  Top Layer w30: R8.2 v1@-326.52,1390.81
  Bottom Layer w15: J4.1 -321,1517.54 v1(-321,1394)
NetJ6_1: J6.1 J7.3 J8.1 | length 481.8
  Top Layer w20: J7.3@-207.4,219 -192.85,204.45 J7.3
  Top Layer w30: -351,219 J7.3@-207.4,219 ; J7.3@-202.78,230.71 -192.85,220.78 J7.3 ; J7.3@-194.7,220.02 -59.43,355.3 J8.1
NetJ7_2: J7.2 J8.2 J9.1 | length 486.5
  Top Layer w15: J7.2 200.85,221.87 206,221.87 J7.2@223.13,239
  Top Layer w30: J8.2 39,380.02 J7.2@199,220.02 ; J7.2@223.13,239 342.54,239 J9.1
NetQ1_1: Q1.1 R11.2 | length 565.6
  Top Layer w30: Q1.1 -643.76,690.3 -639.02,690.3 -457.54,871.77 -457.54,1081.69 -438.43,1100.81 -413.64,1100.81 R11.2
NetQ2_1: Q2.1 R13.1 | length 1364.3
  Top Layer w15: R13.1@399.37,1123.82 R13.1
  Top Layer w30: R13.1@399.37,1123.82 404,1119.2 v1(404,1064)
  Bottom Layer w15: Q2.1 -591.66,919.5 259.5,919.5 v1(404,1064)
NetR2_1: R2.1 R_op1.1 U2.2 | length 979.1
  Top Layer w15: U2.2 23.78,1480.18 32.67,1489.07 v1(35,1489.07) ; v1(640,1530) 641.65,1528.35 641.65,1478.9 R_op1.1@645.55,1475
  Top Layer w30: R_op1.1@645.55,1475 645.55,1371.84 684.45,1332.95 R2.1
  Bottom Layer w15: v1(35,1489.07) 98.67,1552.73 617.27,1552.73 v1(640,1530)
NetR4_2: R4.2 R5.1 U3.4 | length 423.3
  Top Layer w15: R4.2 -265.56,1644 R4.2@-254.95,1633.39 ; -19.05,1634.41 -19.05,1642.29 -14.74,1646.6 U3.4 -5.76,1647.7 72.9,1647.7 R5.1@74,1648.8
  Top Layer w20: R4.2@-254.95,1633.39 -254.95,1602.95 -231,1579 -74.47,1579 -19.05,1634.41
NetR6_1: R6.1 R9.2 U2.9 | length 231.2
  Top Layer w15: U2.9 214,1377.82 239.08,1352.74 R6.1 239,1357.74 R9.2 R9.2@244,1469.63
NetR8_1: R8.1 R10.2 U2.6 | length 1525.6
  Top Layer w15: R8.1 -373.19,1317.19 R8.1@-361,1305 ; R10.2@-366.45,413 -354.27,400.81 R10.2 -337.73,400.81 -325.55,413 -325.55,421.26
  Top Layer w20: R8.1 -257.85,1317.19 -181.04,1394 -146,1394 -129.82,1377.82 U2.6
  Top Layer w30: v1(-361,1269) R8.1@-361,1305 ; -325.55,421.26 -176,570.81 v1(-176,974)
  Bottom Layer w15: v1@-362.65,1267.35 v1(-361,1269)
  Bottom Layer w30: v1@-362.65,1267.35 -362.65,1240.54 -376,1227.19 -376,1049 -301,974 v1(-176,974)
NetR14_1: R14.1 R16.2 R17.2 U2.13 | length 786.2
  Top Layer w15: R17.2@28.5,1281.43 175.93,1134 R14.1 ; R17.2 26.88,1283.04 26.88,1442.39 50.61,1466.12 53.84,1466.12 67.91,1480.18 U2.13 180.47,1480.18 204.53,1504.25 291.93,1504.25 325.14,1537.46 R16.2
pads on no net: J7. R12.1

## Polygon pours and split planes (outlines as drawn)
GND on Top Layer "3" (solid, pour order 25): -976,2349 1104,2349 1104,-421 1099,-426 -976,-426
+3.7v on Top Layer "+3.7V_L01_P018" (solid, pour order 18): 89,1706.76 166.76,1629 259,1629 329,1699 329,1859 189,1999 164,2024 114,2024 89,1999
-3.3V on Top Layer "-3.3V_L01_P020" (solid, pour order 20): -935,1095.28 -818.72,979 169,979 294,1104 294,1184 259,1219 189,1289 189,1427.18 162.18,1454 64,1454 -181,1209 -921,1209 -935,1195
+3.3V on Top Layer "+3.3V_L01_P015" (solid, pour order 15): -218.5,1224 -191,1224 -126,1289 -126,1364 -136,1374 -176,1374 -236,1314 -236,1235.67
-3.3V on Top Layer "-3.3V_L01_P016" (solid, pour order 16): -21,1754 -46,1729 -46,1599 -26,1579 74,1579 109,1614 109,1679 59,1729 59,1754
+3.3V on Top Layer "+3.3V_L01_P017" (solid, pour order 17): -276,1089 -316,1049 -316,814 -286,784 -236,784 -206,814 -206,1054 -241,1089
-3.7V on Top Layer "-3.7V_L01_P019" (solid, pour order 19): -231,1884 -231,1604 -216,1589 -96,1589 -76,1609 -76,1969 -121,2014 -186,2014 -231,1969
GND on Bottom Layer "GND_L02_P024" (solid, remove dead copper, pour order 24): -976,2379 1049,2379 1049,-396 1059,-406 -976,-406
+3.3V on Bottom Layer "+3.3V_L02_P021" (solid, pour order 21): 114,1604 129,1589 404,1589 414,1599 414,1674 394,1694 179,1694 114,1629
+3.3V on Bottom Layer "+3.3V_L02_P022" (solid, pour order 22): -316,1224 -316,1274 -186,1404 -186,1644 -156,1674 -51,1674 84,1809 124,1809 139,1794 139,1574 129,1574 -221,1224 -231,1224
+3.3V on Bottom Layer "+3.3V_L02_P023" (solid, pour order 23): -271,544 -206,609 -206,1264 -251,1309 -281,1309 -316,1274 -316,1014 -621,709 -621,584 -586,549

## Silkscreen, mask and mechanical layers (free items; w line width, h text height)
Top Overlay:
  lines w15: -41,1099 -11,1099 ; -26,1084 -26,1114 ; 64,1099 84,1099 ; 794,1119 824,1119 ; 809,1009 809,1029 ; 809,1104 809,1134
  text "Volume Adj" at -640,1865 h30
  text "-3.7V" at -206,1859 h30
  text "GND" at -41,1859 h30
  text "+3.7V" at 69,1859 h30
  text "NC Adj" at 510,1850 h30
  text "Hertz" at 594.82,588.02 h90
  text "L" at -141,459 h30
  text "R" at 79,454 h30
  text "L" at -446,224 h30
  text "R" at 439,219 h30
Bottom Overlay:
  lines w15: -41,1099 -11,1099 ; -26,1084 -26,1114 ; 64,1099 84,1099 ; 794,1119 824,1119 ; 809,1009 809,1029 ; 809,1104 809,1134
  text "L" at -106,474 h30
  text "R" at 114,469 h30
  text "Hertz" at 629.18,314.02 h90
Mechanical 1:
  lines w0.5: -975.5,1196.46 cw(c8.75,1196.46) 993,1196.46
  lines w15: -975.5,802.76 -975.5,1196.46 ; 993,802.76 993,1196.46

## Text inside footprints (layer, text, board x,y; h text height)
J7: Top 3D Body "PCB EDGE" at 279.59,-123.95 h30